# Altium PCB HANC_ANALOG.PcbDoc (part 1 of 2)
Units mil, origin at the board's own origin, x right, y up, seen from the top; angles counter-clockwise.
Board outline 6270 x 3835 mil, 2 copper layers (Top Layer, Bottom Layer); 187 components, 142 nets, 552 pads, 153 vias.
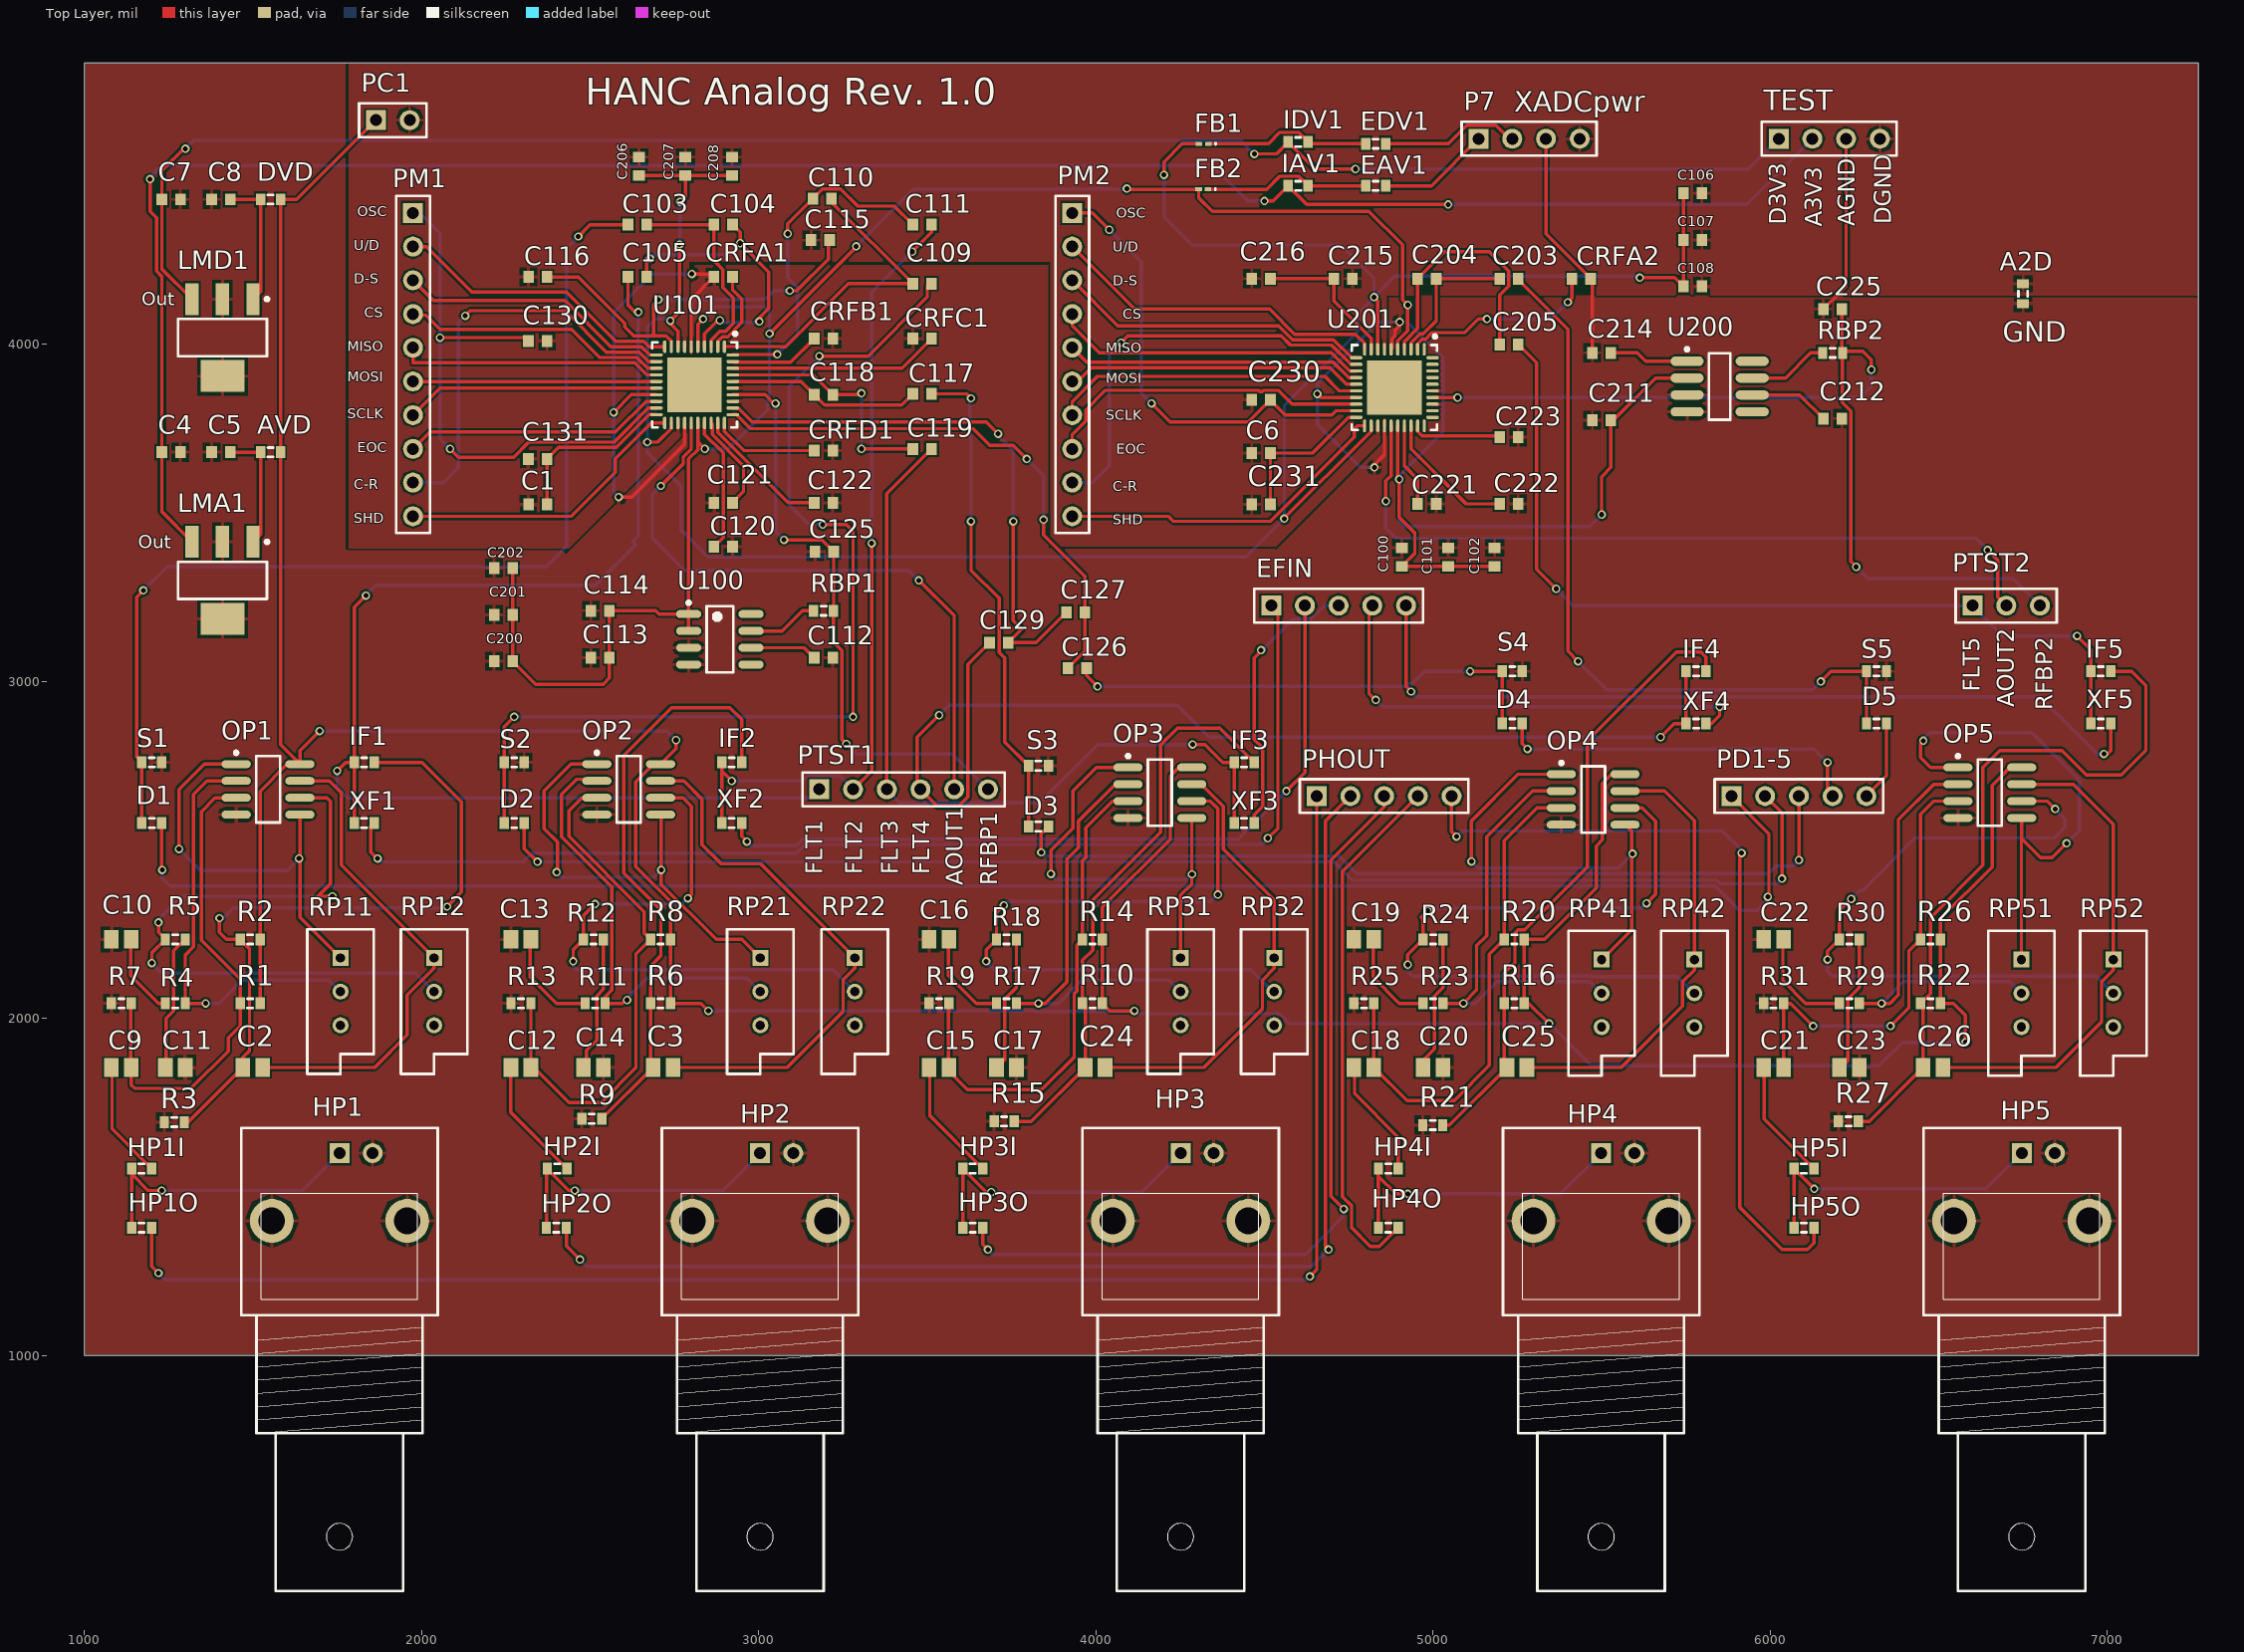
[diagram p0: Top Layer view]
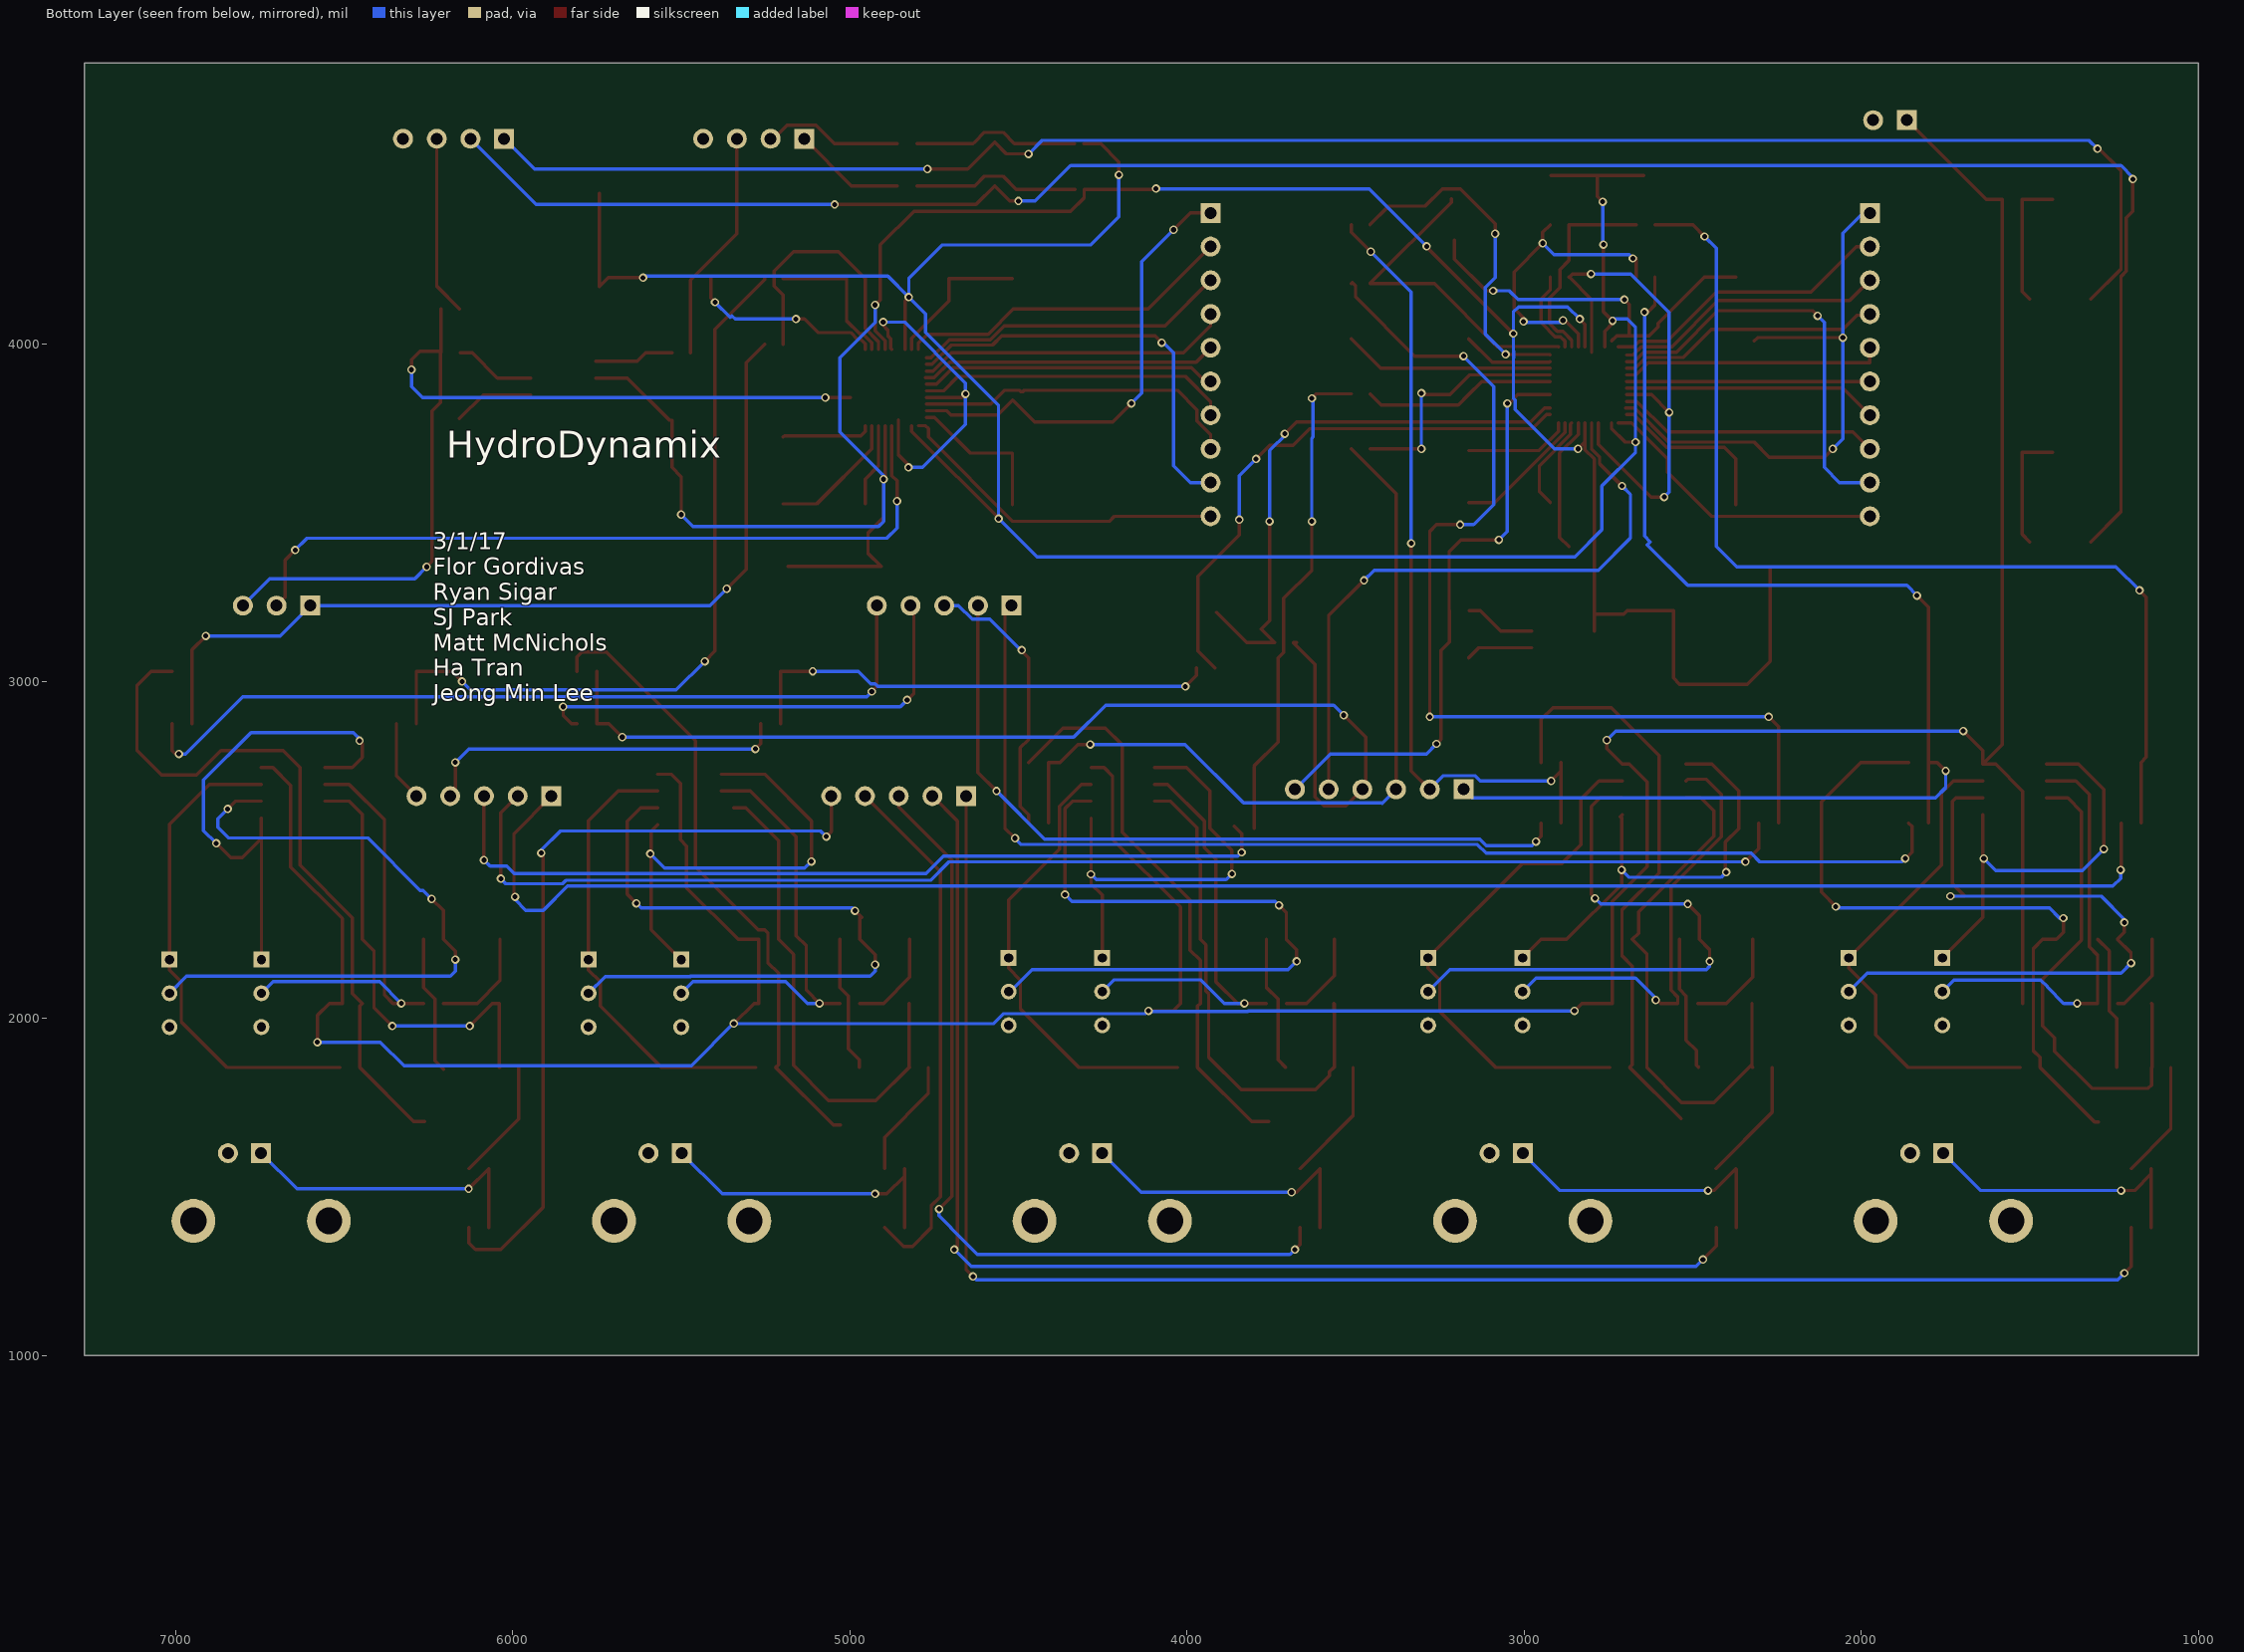
[diagram p1: Bottom Layer view, seen from below]

## Layer stack, top to bottom
Top Solder: solder mask 0.4, Solder Resist, Dk 3.5
Top Layer: signal copper 1.4
Dielectric 1: dielectric 12.6, FR-4, Dk 4.8
Bottom Layer: signal copper 1.4
Bottom Solder: solder mask 0.4, Solder Resist, Dk 3.5

## Board outline
1000,1000 1000,4835 7270,4835 7270,1000

## Design rules (kind name [scope] priority, off if disabled: settings)
Clearance [All] p1: gap=6
MinimumSolderMaskSliver [All] p1 off: minsoldermaskwidth=8
PolygonConnect [All] p1: connectstyle=Relief reliefconductorwidth=10 reliefentries=4 polygonreliefangle="90 Angle" airgapwidth=10
RoutingVias [All] p1: holewidth=15 width=25 viastyle="Through Hole" minholewidth=15 minwidth=25 maxholewidth=15 maxwidth=25
SolderMaskExpansion [All] p1: expansion=4
Width [All] p1: maxlimit=10 minlimit=10 preferedwidth=10
29 further rules are at their usual default settings.

## Classes and differential pairs
component class U_MAXIM-ADC2: 30 C200 C201 C202 C203 C204 C205 C207 C208 C211 C212 C214 C215 C216 C221 C222 C223 C225 C230 C231 CRFA2 PTST2 RBP2 S5 U200 U201
component class U_MAXIM-ADC1: C100 C102 C103 C104 C105 C106 C107 C108 C109 C110 C111 C112 C113 C114 C115 C116 C117 C118 C119 C120 C121 C122 C125 C126 C127 C129 C130 C131 CRFA1 CRFB1 CRFC1 CRFD1 D1 D2 D3 D4 D5 EAV1 EDV1 EFIN FB1 FB2 IAV1 IDV1 PD1-5 PHOUT PTST1 RBP1 S1 S2 S3 S4 U100 U101
component class HANC_Analog_TS: A2D AVD C1 C4 C5 C6 C7 C8 DVD LMA1 LMD1 P7 PC1 PM1 PM2 TEST
component class HAMP2: C21 C22 C23 C26 HP5 HP5I HP5O IF5 OP5 R22 R26 R27 R29 R30 R31 RP51 RP52 XF5
component class HAMP1: C2 C3 C9 C10 C11 C12 C13 C14 C15 C16 C17 C18 C19 C20 C24 C25 HP1 HP1I HP1O HP2 HP2I HP2O HP3 HP3I HP3O HP4 HP4I HP4O IF1 IF2 IF3 IF4 OP1 OP2 OP3 OP4 R1 R2 R3 R4 R5 R6 R7 R8 R9 R10 R11 R12 R13 R14 R15 R16 R17 R18 R19 R20 R21 R23 R24 R25 RP11 RP12 RP21 RP22 RP31 RP32 RP41 RP42 XF1 XF2 XF3 XF4
polygon class DGND: NONET_L01_P000
polygon class AGND: NONET_L01_P002

## Components (designator, comment, footprint, x,y, rotation, side; value= is the part's Value field where it differs from the comment)
A2D "Res3" J1-0603 6750,4150 r270 top
AVD "Res3" J1-0603 1552.62,3680 r180 top
C1 "Cap Semi" 1608[0603] 2345,3525 r0 top
C2 "Cap Semi" C0805 1499.87,1855 r180 top
C3 "Cap Semi" C0805 2716.87,1855 r180 top
C4 "Cap Semi" 1608[0603] 1257.62,3680 r180 top
C5 "Cap Semi" 1608[0603] 1405.12,3680 r0 top
C6 "Cap Semi" 1608[0603] 4490,3677.5 r0 top
C7 "Cap Semi" 1608[0603] 1257.62,4430 r180 top
C8 "Cap Semi" 1608[0603] 1405.12,4430 r0 top
C9 "Cap Semi" C0805 1110,1855 r0 top
C10 "Cap Semi" C0805 1110,2235 r0 top
C11 "Cap Semi" C0805 1270,1855 r180 top
C12 "Cap Semi" C0805 2295,1855 r0 top
C13 "Cap Semi" C0805 2295,2235 r0 top
C14 "Cap Semi" C0805 2510,1855 r180 top
C15 "Cap Semi" C0805 3535,1855 r0 top
C16 "Cap Semi" C0805 3535,2235 r0 top
C17 "Cap Semi" C0805 3735,1855 r180 top
C18 "Cap Semi" C0805 4795,1855 r0 top
C19 "Cap Semi" C0805 4795,2235 r0 top
C20 "Cap Semi" C0805 5000,1855 r180 top
C21 "Cap Semi" C0805 6010,1855 r0 top
C22 "Cap Semi" C0805 6010,2235 r0 top
C23 "Cap Semi" C0805 6235,1855 r180 top
C24 "Cap Semi" C0805 3998,1855 r180 top
C25 "Cap Semi" C0805 5249,1855 r180 top
C26 "Cap Semi" C0805 6483,1855 r180 top
C100 "Cap Semi" 1608[0603] 4907,3369 r90 top
C101 "Cap Semi" 1608[0603] 5045,3369 r90 top
C102 "Cap Semi" 1608[0603] 5183,3369 r90 top
C103 "Cap Semi" 1608[0603] 2640,4355 r0 top
C104 "Cap Semi" 1608[0603] 2895,4355 r180 top
C105 "Cap Semi" 1608[0603] 2640,4200 r0 top
C106 "Cap Semi" 1608[0603] 5770,4448 r0 top
C107 "Cap Semi" 1608[0603] 5770,4310 r0 top
C108 "Cap Semi" 1608[0603] 5770,4172 r0 top
C109 "Cap Semi" 1608[0603] 3485,4180 r180 top
C110 "Cap Semi" 1608[0603] 3188.44,4432.33 r0 top
C111 "Cap Semi" 1608[0603] 3485,4355 r180 top
C112 "Cap Semi" 1608[0603] 3192.44,3070 r0 top
C113 "Cap Semi" 1608[0603] 2530,3070 r180 top
C114 "Cap Semi" 1608[0603] 2530,3210 r180 top
C115 "Cap Semi" 1608[0603] 3183,4309 r180 top
C116 "Cap Semi" 1608[0603] 2345,4200 r180 top
C117 "Cap Semi" 1608[0603] 3485,3853.33 r180 top
C118 "Cap Semi" 1608[0603] 3192.44,3850.83 r180 top
C119 "Cap Semi" 1608[0603] 3485,3690 r180 top
C120 "Cap Semi" 1608[0603] 2895,3400 r180 top
C121 "Cap Semi" 1608[0603] 2895,3530 r180 top
C122 "Cap Semi" 1608[0603] 3192.44,3530 r180 top
C125 "Cap Semi" 1608[0603] 3195,3385 r180 top
C126 "Cap Semi" 1608[0603] 3945,3040 r180 top
C127 "Cap Semi" 1608[0603] 3940,3205 r0 top
C129 "Cap Semi" 1608[0603] 3712.44,3115 r0 top
C130 "Cap Semi" 1608[0603] 2344.88,4010 r0 top
C131 "Cap Semi" 1608[0603] 2344.88,3660 r180 top
C200 "Cap Semi" 1608[0603] 2243,3060 r180 top
C201 "Cap Semi" 1608[0603] 2243,3198 r180 top
C202 "Cap Semi" 1608[0603] 2243,3336 r180 top
C203 "Cap Semi" 1608[0603] 5225,4195 r180 top
C204 "Cap Semi" 1608[0603] 4981.95,4195 r0 top
C205 "Cap Semi" 1608[0603] 5225,4000 r180 top
C206 "Cap Semi" 1608[0603] 2645,4528 r90 top
C207 "Cap Semi" 1608[0603] 2783,4528 r90 top
C208 "Cap Semi" 1608[0603] 2921,4528 r90 top
C211 "Cap Semi" 1608[0603] 5500,3775 r180 top
C212 "Cap Semi" 1608[0603] 6185,3780 r0 top
C214 "Cap Semi" 1608[0603] 5500,3975 r180 top
C215 "Cap Semi" 1608[0603] 4733.33,4195 r0 top
C216 "Cap Semi" 1608[0603] 4490,4195 r180 top
C221 "Cap Semi" 1608[0603] 4981.95,3526.91 r180 top
C222 "Cap Semi" 1608[0603] 5225,3526.91 r0 top
C223 "Cap Semi" 1608[0603] 5225,3725 r180 top
C225 "Cap Semi" 1608[0603] 6185,4105 r180 top
C230 "Cap Semi" 1608[0603] 4490,3835 r180 top
C231 "Cap Semi" 1608[0603] 4490,3525 r180 top
CRFA1 "Cap Semi" 1608[0603] 2895,4200 r0 top
CRFA2 "Cap Semi" 1608[0603] 5440,4195 r180 top
CRFB1 "Cap Semi" 1608[0603] 3192.44,4016.67 r180 top
CRFC1 "Cap Semi" 1608[0603] 3485,4016.67 r0 top
CRFD1 "Cap Semi" 1608[0603] 3192.44,3685 r180 top
D1 "Res3" J1-0603 1200,2580 r180 top
D2 "Res3" J1-0603 2275,2580 r180 top
D3 "Res3" J1-0603 3830,2570 r180 top
D4 "Res3" J1-0603 5235,2875 r180 top
D5 "Res3" J1-0603 6315,2875 r180 top
DVD "Res3" J1-0603 1552.62,4430 r180 top
EAV1 "Res3" J1-0603 4830,4470 r0 top
EDV1 "Res3" J1-0603 4830,4595 r0 top
EFIN "Header 5" HDR1X5 4520,3225 r0 top
FB1 "FerriteBead" 0603 4320,4595 r180 top
FB2 "FerriteBead" 0603 4318.78,4460 r180 top
HP1 "BNC" "BNC_RA CON" 1756.91,1600.79 r90 top
HP1I "Res3" J1-0603 1170,1555 r180 top
HP1O "Res3" J1-0603 1170,1380 r0 top
HP2 "BNC" "BNC_RA CON" 3004.13,1600.79 r90 top
HP2I "Res3" J1-0603 2402.5,1555 r180 top
HP2O "Res3" J1-0603 2400,1380 r0 top
HP3 "BNC" "BNC_RA CON" 4251.35,1600.79 r90 top
HP3I "Res3" J1-0603 3635,1555 r180 top
HP3O "Res3" J1-0603 3635,1380 r0 top
HP4 "BNC" "BNC_RA CON" 5498.57,1600.79 r90 top
HP4I "Res3" J1-0603 4867.5,1555 r180 top
HP4O "Res3" J1-0603 4867.5,1380 r0 top
HP5 "BNC" "BNC_RA CON" 6745.79,1600.79 r90 top
HP5I "Res3" J1-0603 6100,1555 r180 top
HP5O "Res3" J1-0603 6100,1380 r0 top
IAV1 "Res3" J1-0603 4600,4470 r180 top
IDV1 "Res3" J1-0603 4600,4600 r180 top
IF1 "Res3" J1-0603 1830,2760 r0 top
IF2 "Res3" J1-0603 2920,2760 r0 top
IF3 "Res3" J1-0603 4440,2760 r0 top
IF4 "Res3" J1-0603 5780,3030 r0 top
IF5 "Res3" J1-0603 6980.47,3030 r0 top
LMA1 "LM3940" SOT223_N 1410,3300 r270 top
LMD1 "LM3940" SOT223_N 1410,4020 r270 top
OP1 "OP262TRZ-EP" ADI-R-8_N 1545,2680 r0 top
OP2 "OP262TRZ-EP" ADI-R-8_N 2614.64,2680 r0 top
OP3 "OP262TRZ-EP" ADI-R-8_N 4190,2670 r0 top
OP4 "OP262TRZ-EP" ADI-R-8_N 5475,2650 r0 top
OP5 "OP262TRZ-EP" ADI-R-8_N 6651.3,2670 r0 top
P7 "Header 4" HDR1X4 5135,4610 r0 top
PC1 "Header 2" HDR1X2 1865,4665 r0 top
PD1-5 "Header 5" HDR1X5 5885,2660 r0 top
PHOUT "Header 5" HDR1X5 4655,2660 r0 top
PM1 "Header 10" HDR1X10 1975,4390 r270 top
PM2 "Header 10" HDR1X10 3930,4390 r270 top
PTST1 "Header 6" HDR1X6 3180,2680 r0 top
PTST2 "Header 3" HDR1X3 6600,3225 r0 top
R1 "Res3" J1-0603 1492,2045 r0 top
R2 "Res3" J1-0603 1492,2235 r0 top
R3 "Res3" J1-0603 1267,1693 r0 top
R4 "Res3" J1-0603 1270,2045 r0 top
R5 "Res3" J1-0603 1270,2235 r180 top
R6 "Res3" J1-0603 2709,2045 r0 top
R7 "Res3" J1-0603 1110,2045 r0 top
R8 "Res3" J1-0603 2709,2235 r0 top
R9 "Res3" J1-0603 2505,1703 r0 top
R10 "Res3" J1-0603 3990.13,2045 r0 top
R11 "Res3" J1-0603 2515,2045 r0 top
R12 "Res3" J1-0603 2510,2235 r180 top
R13 "Res3" J1-0603 2295,2045 r0 top
R14 "Res3" J1-0603 3990.13,2235 r0 top
R15 "Res3" J1-0603 3728,1695 r0 top
R16 "Res3" J1-0603 5241.13,2045 r0 top
R17 "Res3" J1-0603 3735,2045 r0 top
R18 "Res3" J1-0603 3735,2235 r180 top
R19 "Res3" J1-0603 3535,2045 r0 top
R20 "Res3" J1-0603 5241.13,2235 r0 top
R21 "Res3" J1-0603 4999,1684 r0 top
R22 "Res3" J1-0603 6475.13,2045 r0 top
R23 "Res3" J1-0603 5000,2045 r0 top
R24 "Res3" J1-0603 5000,2235 r180 top
R25 "Res3" J1-0603 4795,2045 r0 top
R26 "Res3" J1-0603 6475.13,2235 r0 top
R27 "Res3" J1-0603 6232,1695 r0 top
R29 "Res3" J1-0603 6235,2045 r0 top
R30 "Res3" J1-0603 6235,2235 r180 top
R31 "Res3" J1-0603 6010,2045 r0 top
RBP1 "Res3" J1-0603 3192.44,3210 r180 top
RBP2 "Res3" J1-0603 6185,3975 r180 top
RP11 "10k" Trim_Bourns3296 1760,2080 r270 top
RP12 "10k" Trim_Bourns3296 2037.5,2080 r270 top
RP21 "10k" Trim_Bourns3296 3005,2080 r270 top
RP22 "10k" Trim_Bourns3296 3285,2080 r270 top
RP31 "10k" Trim_Bourns3296 4251.35,2080 r270 top
RP32 "10k" Trim_Bourns3296 4528.85,2080 r270 top
RP41 "10k" Trim_Bourns3296 5500,2075 r270 top
RP42 "10k" Trim_Bourns3296 5775,2075 r270 top
RP51 "10k" Trim_Bourns3296 6745,2075 r270 top
RP52 "10k" Trim_Bourns3296 7017.5,2075 r270 top
S1 "Res3" J1-0603 1200,2760 r180 top
S2 "Res3" J1-0603 2275,2760 r180 top
S3 "Res3" J1-0603 3830,2750 r180 top
S4 "Res3" J1-0603 5235,3030 r180 top
S5 "Res3" J1-0603 6315,3030 r180 top
TEST "Header 4" HDR1X4 6025,4610 r0 top
U100 "MAX6126AASA41+" MAXM-S8+4_L 2885,3125 r0 top
U101 "MAX11043" QFN50P600X600X80_HS-41N 2810,3880 r270 top
U200 "MAX6126AASA41+" MAXM-S8+4_M 5850,3875 r0 top
U201 "MAX11043" QFN50P600X600X80_HS-41N 4885.5,3871.81 r270 top
XF1 "Res3" J1-0603 1830,2580 r180 top
XF2 "Res3" J1-0603 2920,2580 r180 top
XF3 "Res3" J1-0603 4440,2580 r180 top
XF4 "Res3" J1-0603 5780,2875 r180 top
XF5 "Res3" J1-0603 6980.47,2875 r180 top

## Footprints (in the part's own frame and the unit in brackets; to place one, negate y for a bottom-side part, rotate by r counter-clockwise, add the part's x,y. Pads: shape width x height; smd on the part's side, far side on the other; paste and mask are expansions set on the pad)
0603 [mm] "Chip Inductor, Body 0.6x0.3mm, IPC High Density"
  rect 0.5x0.3 smd: 1(-0.35,0) 2(0.35,0)
  silkscreen extent -0.9,-0.05 -0.9,0.05, body extent -0.33,-0.18 0.33,0.18, height 0.55
1608[0603] [mm] "Chip Capacitor, Body 1.6x0.8mm, IPC High Density"
  rect 0.8x0.9 smd: 1(-0.7,0) 2(0.7,0)
  body extent -0.87,-0.48 0.87,0.48, height 1.3
ADI-R-8_N [mm] "SOIC, 8-Leads, Body 4.9x3.9mm, Pitch 1.27mm, IPC Medium Density"
  oval 2.2x0.6 smd: 1(-2.4,1.905) 2(-2.4,0.635) 3(-2.4,-0.635) 4(-2.4,-1.905) 5(2.4,-1.905) 6(2.4,-0.635) 7(2.4,0.635) 8(2.4,1.905)
  silkscreen extent -2.52,-2.5 0.9,2.88, body extent -2,-2.5 2,2.5, height 1.75
"BNC_RA CON" [mm] "Connector; BNC Elbow"
  rect 1.5x1.5 hole 0.9: 1(0,0)
  round 3.3 hole 2: 2(-5.1,-5.1) 2(-5.1,5.1)
  round 1.5 hole 0.9: 2(0,-2.5)
  silkscreen extent -33,-7.4 1.9,7.4
C0805 [mm] "Chip Capacitor, Body 2.0x1.3mm, IPC High Density"
  rect 1.1x1.4 smd: 1(-0.75,0) 2(0.75,0)
  body extent -1.1,-0.72 1.1,0.72, height 1.4
HDR1X2 [mm] "Connector; Header; 2 Position"
  rect 1.5x1.5 hole 0.9: 1(0,0)
  round 1.5 hole 0.9: 2(2.54,0)
  silkscreen extent -1.27,-1.27 3.81,1.27
HDR1X3 [mm] "Connector; Header; 3 Position"
  rect 1.5x1.5 hole 0.9: 1(0,0)
  round 1.5 hole 0.9: 2(2.54,0) 3(5.08,0)
  silkscreen extent -1.27,-1.27 6.35,1.27
HDR1X4 [mm] "Connector; Header; 4 Position"
  rect 1.5x1.5 hole 0.9: 1(0,0)
  round 1.5 hole 0.9: 2(2.54,0) 3(5.08,0) 4(7.62,0)
  silkscreen extent -1.27,-1.27 8.89,1.27
HDR1X5 [mm] "Connector; Header; 5 Position"
  rect 1.5x1.5 hole 0.9: 1(0,0)
  round 1.5 hole 0.9: 2(2.54,0) 3(5.08,0) 4(7.62,0) 5(10.16,0)
  silkscreen extent -1.27,-1.27 11.43,1.27
HDR1X6 [mm] "Connector; Header; 6 Position"
  rect 1.5x1.5 hole 0.9: 1(0,0)
  round 1.5 hole 0.9: 2(2.54,0) 3(5.08,0) 4(7.62,0) 5(10.16,0) 6(12.7,0)
  silkscreen extent -1.27,-1.27 13.97,1.27
HDR1X10 [mm] "Connector; Header; 10 Position"
  rect 1.5x1.5 hole 0.9: 1(0,0)
  round 1.5 hole 0.9: 2(2.54,0) 3(5.08,0) 4(7.62,0) 5(10.16,0) 6(12.7,0) 7(15.24,0) 8(17.78,0) 9(20.32,0) 10(22.86,0)
  silkscreen extent -1.27,-1.27 24.13,1.27
J1-0603 [mm] "Chip Resistor, Body 1.6x0.8mm, IPC High Density"
  rect 0.7x0.9 smd: 1(-0.75,0) 2(0.75,0)
  silkscreen extent -0.2,-0.35 0.2,0.35, body extent -0.85,-0.48 0.85,0.48, height 0.9
MAXM-S8+4_L [mm] "SOIC, 8-Leads, Body 4.9x3.9mm, Pitch 1.27mm, IPC High Density"
  oval 1.9x0.6 smd: 1(-2.35,1.905) 2(-2.35,0.635) 3(-2.35,-0.635) 4(-2.35,-1.905) 5(2.35,-1.905) 6(2.35,-0.635) 7(2.35,0.635) 8(2.35,1.905)
  silkscreen extent -2.47,-2.5 1,2.88, body extent -2,-2.5 2,2.5, height 1.75
MAXM-S8+4_M [mm] "SOIC, 8-Leads, Body 4.9x3.9mm, Pitch 1.27mm, IPC Low Density"
  oval 2.5x0.7 smd: 1(-2.45,1.905) 2(-2.45,0.635) 3(-2.45,-0.635) 4(-2.45,-1.905) 5(2.45,-1.905) 6(2.45,-0.635) 7(2.45,0.635) 8(2.45,1.905)
  silkscreen extent -2.57,-2.5 0.8,2.93, body extent -2,-2.5 2,2.5, height 1.75
QFN50P600X600X80_HS-41N [mm] "QFN, 40-Leads, Body 6.00x6.00mm, Pitch 0.50mm, Thermal Pad 4.10x4.10mm, IPC Medium Density"
  oval 0.95x0.25 smd: 1(-2.875,2.25) 2(-2.875,1.75) 3(-2.875,1.25) 4(-2.875,0.75) 5(-2.875,0.25) 6(-2.875,-0.25) 7(-2.875,-0.75) 8(-2.875,-1.25) 9(-2.875,-1.75) 10(-2.875,-2.25) 21(2.875,-2.25) 22(2.875,-1.75) 23(2.875,-1.25) 24(2.875,-0.75) 25(2.875,-0.25) 26(2.875,0.25) 27(2.875,0.75) 28(2.875,1.25) 29(2.875,1.75) 30(2.875,2.25)
  oval 0.25x0.95 smd: 11(-2.25,-2.875) 12(-1.75,-2.875) 13(-1.25,-2.875) 14(-0.75,-2.875) 15(-0.25,-2.875) 16(0.25,-2.875) 17(0.75,-2.875) 18(1.25,-2.875) 19(1.75,-2.875) 20(2.25,-2.875) 31(2.25,2.875) 32(1.75,2.875) 33(1.25,2.875) 34(0.75,2.875) 35(0.25,2.875) 36(-0.25,2.875) 37(-0.75,2.875) 38(-1.25,2.875) 39(-1.75,2.875) 40(-2.25,2.875)
  rect 4.1x4.1 smd: 41(0,0)
  silkscreen extent -3.97,-3.2 3.2,3.2, body extent -3.05,-3.05 3.05,3.05, height 0.8
SOT223_N [mm] "SOT223, 4-Leads, Body 6.5x3.5mm, Pitch 2.3mm, Lead Span 7mm, IPC Medium Density"
  rect 2.4x1 smd: 1(-2.9,2.3) 2(-2.9,0) 3(-2.9,-2.3)
  rect 2.4x3.3 smd: 4(2.9,0)
  silkscreen extent -3.02,-3.35 1.4,3.48, body extent -1.85,-3.35 1.85,3.35, height 1.7
Trim_Bourns3296 [mm] "Trimmer Bourns3296 or AB-85W"
  rect 1.2x1.2 hole 0.7: 1(-2.54,0)
  round 1.2 hole 0.7: 2(0,0) 3(2.54,0)
  silkscreen extent -4.7,-2.5 6.2,2.5, body extent -4.6,-2.4 4.6,2.4, height 12.16

## Part data
A2D AVD D1 D2 D3 D4 D5 DVD EAV1 EDV1 HP1I HP1O HP2I HP2O HP3I HP3O HP4I HP4O HP5I HP5O IAV1 IDV1 IF1 IF2 IF3 IF4 IF5 R1 R2 R3 R4 R5 R6 R7 R8 R9 R10 R11 R12 R13 R14 R15 R16 R17 R18 R19 R20 R21 R22 R23 R24 R25 R26 R27 R29 R30 R31 RBP1 RBP2 S1 S2 S3 S4 S5 XF1 XF2 XF3 XF4 XF5: "Resistor"
C1 C2 C3 C4 C5 C6 C7 C8 C9 C10 C11 C12 C13 C14 C15 C16 C17 C18 C19 C20 C21 C22 C23 C24 C25 C26 C100 C101 C102 C103 C104 C105 C106 C107 C108 C109 C110 C111 C112 C113 C114 C115 C116 C117 C118 C119 C120 C121 C122 C125 C126 C127 C129 C130 C131 C200 C201 C202 C203 C204 C205 C206 C207 C208 C211 C212 C214 C215 C216 C221 C222 C223 C225 C230 C231 CRFA1 CRFA2 CRFB1 CRFC1 CRFD1: "Capacitor (Semiconductor SIM Model)"
EFIN PD1-5 PHOUT: "Header, 5-Pin"
FB1 FB2: library part Inductor, "Inductor"
HP1 HP2 HP3 HP4 HP5: "BNC Elbow Connector"
LMA1 LMD1: library part Component_1
OP1 OP2 OP3 OP4 OP5: "Double Channel Wide Bandwidth Operational Amplifier, 15 MHz BW, 13 V/us SR, Military, 8-pin SOIC (R-8), Tube"
P7: "External power for ADC1"
PC1: "Power for analog board"
PM1: "GPIO for ADC1"
PM2: "GPIO for ADC2"
PTST1: "ADC1 signal test"
PTST2: "ADC2 Signal Test Header"
RP11 RP12 RP21 RP22 RP31 RP32 RP41 RP42 RP51 RP52: library part RES_Trim, "Resistor Trimmer"
TEST: "Header, 4-Pin"
U100 U200: library part CMP-0977-00016-1, "Ultra-High-Precision, Ultra-Low-Noise, Series Voltage Reference, 4.096 V, -40 to 125 degC, 8-Pin SOIC (S8+4), RoHS, Tube"

## Via types
v1: diameter 25, hole 15, Top Layer to Bottom Layer, 153 vias

## Nets (pads, with @x,y where several pads share a name; then routed paths per layer and width w, separated by ;. In a path a pad name is that pad's centre, name@x,y a point inside that pad or via, vN(x,y) a via of type N, cw(c..) or ccw(c..) an arc to the next point about the centre after c; other vN are vias at no path point)
5V: AVD.1 DVD.1 OP1.8 OP2.8 OP3.8 OP4.8 OP5.8 PC1.1 R1.2 R2.2 R6.2 R8.2 R10.2 R14.2 R16.2 R20.2 R22.2 R26.2 | length 11776.2
  Top Layer w10: R1.2@1521.53,2045 R2.2@1521.53,2235 1521.53,2674.53 1602,2755 OP1.8@1639.49,2755 ; v1(1698,2853) 1639.49,2794.49 OP1.8@1639.49,2755 ; PC1.1@1865,4665 1630,4430 DVD.1@1582.15,4430 AVD.1@1582.15,3680 1582.15,2812.34 OP1.8@1639.49,2755 ; v1(2755,2826) 2755,2800.87 OP2.8@2709.13,2755 2688,2755 2635,2702 2635,2451.37 2738.53,2347.84 R8.2@2738.53,2235 R6.2@2738.53,2045 2829,2045 v1(2851,2023) ; v1(4114,2023) 4041.65,2023 R10.2@4019.65,2045 R14.2@4019.65,2235 4019.65,2330.65 4221,2532 4221,2720 4246,2745 OP3.8@4284.49,2745 ; v1(5344,1985) 5284,2045 R16.2@5270.65,2045 R20.2@5270.65,2235 5331,2235 5484,2388 5484,2512.14 5502,2530.14 5502,2697 5530,2725 OP4.8@5569.49,2725 ; v1(6579,1930) 6579,2010 6544,2045 R22.2@6504.65,2045 R26.2@6504.65,2235 6504.65,2296.65 6658,2450 6658,2692 6711,2745 OP5.8@6745.79,2745
  Bottom Layer w10: v1(1698,2853) 2728,2853 v1(2755,2826) ; v1(2851,2023) 3818.77,2023 3820.27,2021.5 4112.5,2021.5 v1(4114,2023) 4122.38,2014.62 4543.19,2014.62 4572.81,1985 v1@5339,1985 ; v1(5344,1985) v1@5339,1985 ; v1(6579,1930) 6392,1930 6322,1860 5470,1860 5342,1988 v1@5339,1985
A3V3: C4.2 IAV1.2 LMA1.3 TEST.2 | length 6242.6
  Top Layer w10: v1(1195,4490) 1195,4395 1214.06,4375.94 1214.06,4216.93 1230.06,4200.93 C4.2@1230.06,3680 1230.06,3503.56 LMA1.3@1319.45,3414.17 ; v1(4500,4425) 4525.47,4425 IAV1.2@4570.47,4470 4625.47,4415 v1(5045,4415)
  Bottom Layer w10: v1(1195,4490) 1195,4495 1230,4530 4345,4530 4450,4425 v1(4500,4425) ; v1(5045,4415) 5930,4415 TEST.2@6125,4610
AGND: A2D.2 C4.1 C5.1 C7.1 C8.1 C10.1 C11.1 C13.1 C14.1 C16.1 C17.1 C19.1 C20.1 C22.1 C23.1 C100.2 C101.2 C102.2 C112.2 C113.2 C114.2 C120.1 C121.2 C122.1 C125.2 C200.2 C201.2 C202.2 C211.2 C212.2 C214.2 C221.1 C222.2 C223.1 C225.2 CRFA1.1 CRFA2.1 CRFB1.1 CRFC1.1 CRFD1.1 HP1.2 HP2.2 HP3.2 HP4.2 HP5.2 LMA1.2 LMA1.4 LMD1.2 LMD1.4 OP1.4 OP2.4 OP3.4 OP4.4 OP5.4 P7.3 R3.1 R7.1 R9.1 R13.1 R15.1 R19.1 R21.1 R25.1 R27.1 R31.1 S1.1 S2.1 S3.1 S4.1 S5.1 TEST.3 U100.3 U100.4 U101.6 U101.17 U101.24 U101.33 U101.35 U200.3 U200.4 U201.6 U201.17 U201.24 U201.33 U201.35 | length 3877.9
  Top Layer w10: v1(2570,3798) 2622.47,3850.47 U101.17@2696.81,3850.47 ; v1(2585,3547) 2624,3547 2780.47,3703.47 U101.24@2780.47,3766.81 ; U101.6@2800.16,3976.58 2800.16,4132.72 CRFA1.1@2866.44,4199 ; v1(2802,4209) 2856.44,4209 CRFA1.1@2866.44,4199 ; CRFA1.1@2867.44,4200 CRFA1.1@2866.44,4199 ; v1(4657,3853) 4667.72,3842.28 U201.17@4772.31,3842.28 ; v1(4826,3635) 4826,3642 4855.97,3671.97 U201.24@4855.97,3775.23 ; U201.6@4875.65,3985 4879.34,3988.68 4879.34,4017.07 4887,4024.73 4887,4042 4901,4056 v1(4901,4066) ; P7.3@5335,4610 5335,4327.56 CRFA2.1@5467.56,4195 5472.44,4190.12 C214.2@5472.44,3975 ; C225.2@6157.44,4105 6225,4172.56 TEST.3@6225,4610
  Bottom Layer w10: v1(2585,3547) 2570,3562 v1(2570,3798) 2570,4095 2684,4209 v1(2802,4209) ; v1(4826,3635) 4784,3635 4657,3762 v1(4657,3853) 4657,3885 4838,4066 v1(4901,4066)
AINAP1: C105.1 IF1.1 PTST1.1 XF1.2 | length 3939.4
  Top Layer w10: v1(1750,2735) 1775,2760 IF1.1@1800.47,2760 ; XF1.2@1800.47,2580 IF1.1@1800.47,2760 ; v1(1835,3255) 1800.47,3220.47 IF1.1@1800.47,2760 ; C105.1@2612.44,4200 2612.44,4116.44 2632.88,4096 v1(2643,4096)
  Bottom Layer w10: v1(1750,2735) 1750,2685 1780,2655 3155,2655 PTST1.1@3180,2680 ; v1(1835,3255) 1865,3285 2515,3285 2635,3405 2626,3414 2643,3431 v1(2643,4096)
AINAP2: C205.1 IF5.1 PTST2.1 XF5.2 | length 2651.5
  Top Layer w10: C205.1@5252.56,4000 5307.56,3945 5307.56,3332.44 v1(5365,3275) ; v1(6910,3135) 6950.94,3094.06 IF5.1@6950.94,3030 XF5.2@6950.94,2875
  Bottom Layer w10: v1(5365,3275) 5415,3225 PTST2.1@6600,3225 6690,3135 v1(6910,3135)
AINBP1: C111.1 IF2.1 PTST1.2 XF2.2 | length 2376.3
  Top Layer w10: XF2.2@2890.47,2580 2890.47,2734.53 ; IF2.1@2890.47,2760 2890.47,2734.53 ; v1(2920,2705) 2890.47,2734.53 ; PTST1.2@3280,2680 3335,2735 v1(3335,3410) ; v1(3455,4275) 3512.56,4332.56 C111.1@3512.56,4355
  Bottom Layer w10: v1(2920,2705) 3130.39,2705 3145.92,2720.53 3239.47,2720.53 PTST1.2@3280,2680 ; v1(3335,3410) 3335,4155 v1(3455,4275)
AINCP1: C119.1 IF3.1 PTST1.3 XF3.2 | length 2386.4
  Top Layer w10: PTST1.3@3380,2680 3380,3557.44 C119.1@3512.56,3690 ; v1(4287,2813) 4323,2813 4376,2760 IF3.1@4410.47,2760 XF3.2@4410.47,2580
  Bottom Layer w10: PTST1.3@3380,2680 3421,2639 3421.47,2639.47 3832.47,2639.47 4006,2813 v1(4287,2813)
AINDP1: C129.1 IF4.1 PTST1.4 XF4.2 | length 3355.3
  Top Layer w10: v1(3535,2900) 3470,2835 3470,2690 PTST1.4@3480,2680 3528.58,2631.42 3594.26,2631.42 3620.53,2657.69 3620.53,3050.65 C129.1@3684.88,3115 C129.1@3675,3115 ; v1(5675,2835) 5715,2875 XF4.2@5750.47,2875 IF4.1@5750.47,3030
  Bottom Layer w10: v1(3535,2900) 3565,2930 4241,2930 4336,2835 v1(5675,2835)
AOUT1: PTST1.5 U101.25 | length 1894.8
  Top Layer w10: v1(2710,3580) 2776.48,3646.48 2776.48,3666.48 2800.16,3690.16 U101.25@2800.16,3766.81 ; v1(3475,3300) 3580,3195 PTST1.5@3580,2680
  Bottom Layer w10: v1(2710,3580) 2685,3555 2685,3425 2780,3330 3445,3330 v1(3475,3300)
AOUT2: PTST2.2 U201.25 | length 2309.8
  Top Layer w10: v1(4860,3535) 4860,3595 4875.65,3610.65 U201.25@4875.65,3758.62 ; v1(6645,3390) 6675,3360 6675,3250 PTST2.2@6700,3225
  Bottom Layer w10: v1(4860,3535) 4860,3455 4890,3425 6610,3425 v1(6645,3390)
AVDD: C100.1 C101.1 C102.1 C113.1 C114.1 C200.1 C201.1 C202.1 C211.1 FB2.2 U100.1 U100.2 U101.5 U101.26 U200.2 U201.5 U201.26 | length 7658.1
  Top Layer w10: C202.1@2270.56,3336 C201.1@2270.56,3198 C200.1@2270.56,3060 2338.56,2992 2539,2992 2557.56,3010.56 C113.1@2557.56,3070 C114.1@2557.56,3210 2695,3210 2705,3200 U100.1@2792.48,3200 ; U100.2@2792.48,3150 U100.1@2792.48,3200 ; U101.26@2819.84,3766.81 2819.84,3710.16 ; U101.5@2819.84,3993.19 2819.84,4059.84 v1(2835,4075) ; v1(2840,3690) 2819.84,3710.16 ; v1(3032,4032) 3289,4289 v1(3289,4291) ; v1(4092,4462) 4094,4460 FB2.2@4305,4460 4305,4435 4345,4395 4810,4395 4910,4295 4910,4132 v1(4925,4117) 4925,4040.1 4895.34,4010.44 U201.5@4895.34,3985 ; U201.26@4895.34,3758.62 4895.34,3604.66 v1(4900,3600) 4900,3487 4946,3441 4946,3380.44 C100.1@4907,3341.44 C101.1@5045,3341.44 C102.1@5183,3341.44 ; v1(5500,3495) 5500,3607.44 5527.56,3635 C211.1@5527.56,3775 5535,3775 5660,3900 U200.2@5753.54,3900 ; U100.1@2792.48,3200 2792.48,3659.85 2819.84,3687.21 2819.84,3710.16
  Bottom Layer w10: v1(2835,4075) 2871,4111 3016.73,4111 3032,4095.73 v1(3032,4032) 3032,3980.23 3031.5,3979.73 3031.5,3960.27 3032,3959.77 3032,3840.23 3026.5,3834.73 3026.5,3806.5 2910,3690 v1(2840,3690) ; v1(3289,4291) 3459,4461 4091,4461 v1(4092,4462) ; v1@4924.5,4117 4924.5,4065.5 5030,3960 5030,3740 4900,3610 v1(4900,3600) 4900,3475 4915,3460 5465,3460 v1(5500,3495) ; v1@4925,4115.23 v1(4925,4117)
D3V3: C7.2 IDV1.2 LMD1.3 TEST.1 | length 5358.7
  Top Layer w10: v1(1300,4580) 1300,4585 1230.06,4515.06 C7.2@1230.06,4430 1230.06,4223.56 LMD1.3@1319.45,4134.17 ; v1(4470,4565) 4535.47,4565 IDV1.2@4570.47,4600 4650.47,4520 v1(4770,4520)
  Bottom Layer w10: v1(1300,4580) 1325,4605 4430,4605 v1(4470,4565) ; v1(4770,4520) 5935,4520 TEST.1@6025,4610
DGND: A2D.1 C1.1 C6.1 C106.2 C107.2 C108.2 C115.2 C116.2 C130.2 C131.2 C206.2 C207.2 C208.2 C215.2 C216.2 C230.2 C231.2 P7.4 PC1.2 TEST.4 U101.7 U101.23 U201.7 U201.23
DVDD: C106.1 C107.1 C108.1 C206.1 C207.1 C208.1 FB1.2 U101.8 U101.22 U201.8 U201.22 | length 7105.4
  Top Layer w10: C206.1@2645,4500.44 C207.1@2783,4500.44 ; v1(2670,3710) 2700.9,3710 2741.1,3750.2 U101.22@2741.1,3766.81 ; U101.8@2760.79,3993.19 2760.79,4039.21 2738,4062 v1(2738,4070) 2765,4097 v1(2765,4296) ; v1(2767,4423) 2783,4439 C207.1@2783,4500.44 ; C208.1@2921,4500.44 C207.1@2783,4500.44 ; v1(4202,4503) 4202,4541 4256,4595 FB1.2@4306.22,4595 ; v1(4559,3483) 4559,3485 4802.92,3728.92 4803.51,3728.92 4816.6,3742.01 U201.22@4816.6,3758.62 ; v1(4825,4140) 4836.28,4128.72 U201.8@4836.28,3985 ; v1(5613,4198) 5716.44,4198 C108.1@5742.44,4172 C107.1@5742.44,4310 ; C107.1@5742.44,4295.56 C107.1@5742.44,4310 ; C106.1@5742.44,4448 C107.1@5742.44,4310
  Bottom Layer w10: v1(2738,4070) 2733,4075 2695,4075 2670,4050 v1(2670,3710) 2670,3680 2770,3580 2770,3450 2850,3370 4445,3370 4558,3483 v1(4559,3483) 4559,3819 4775,4035 4775,4090 v1(4825,4140) ; v1(2765,4296) 2767,4298 v1(2767,4423) ; v1(4202,4503) 4202,4378 4285,4295 4725,4295 4825,4195 v1(4825,4140) ; v1(5613,4198) 5609,4202 4887,4202 v1(4825,4140)
DVREG: C215.1 C216.1 U201.9 | length 444.1
  Top Layer w10: C216.1@4517.56,4195 C215.1@4705.77,4195 4705.77,4129.23 4816.6,4018.4 U201.9@4816.6,3985
DVREG: C115.1 C116.1 U101.9 | length 1177.1
  Top Layer w10: C116.1@2372.56,4200 2465,4200 2602.5,4062.5 2602.5,4052.27 2629.77,4025 2689.69,4025 ; v1(2703,4133) 2688,4118 2688,4026.69 2689.69,4025 ; 2725.9,4025 2689.69,4025 ; 2726.5,4024.4 U101.9@2741.1,4009.8 ; v1(3092,4159) 3113,4159 3207,4253 C115.1@3207,4309
  Bottom Layer w10: v1(2703,4133) 3018,4133 3044,4159 v1(3092,4159)
EXT_AMP1_H1_IN: HP1O.2 PHOUT.1 | length 5004.2
  Top Layer w10: HP1O.2@1199.53,1380 1199.53,1265.47 v1(1220,1245) ; v1(4635,1235) 4655,1255 PHOUT.1@4655,2660
  Bottom Layer w10: v1(1220,1245) 1240,1225 4625,1225 v1(4635,1235)
EXT_AMP1_H1_OUT: EFIN.1 XF1.1 | length 3501.6
  Top Layer w10: XF1.1@1859.53,2580 1850,2570.47 1850,2494.06 1869.06,2475 v1(1870,2475) ; v1(4510,2535) 4540,2565 4540,3205 EFIN.1@4520,3225
  Bottom Layer w10: v1(1870,2475) 1880,2465 2301.23,2465 2327.23,2491 3113,2491 3138.5,2516.5 4491.5,2516.5 v1(4510,2535)
EXT_AMP2_H2_IN: HP2O.2 PHOUT.2 | length 3740.1
  Top Layer w10: HP2O.2@2429.53,1380 2429.53,1325.47 v1(2470,1285) ; v1(4690,1315) 4681,1324 4681,2586 PHOUT.2@4755,2660
  Bottom Layer w10: v1(2470,1285) 2490,1265 4640,1265 v1(4690,1315)
EXT_AMP2_H2_OUT: EFIN.2 XF2.1 | length 2306.3
  Top Layer w10: XF2.1@2949.53,2580 2949.53,2540.47 v1(2965,2525) ; v1(4565,2675) 4620,2730 EFIN.2@4620,3225
  Bottom Layer w10: v1(2965,2525) 2977,2513 3112.37,2513 3131.87,2532.5 4422.5,2532.5 v1(4565,2675)
EXT_AMP3_H3_IN: HP3O.2 PHOUT.3 | length 2507.5
  Top Layer w10: HP3O.2@3664.53,1380 3664.53,1330.47 v1(3680,1315) ; v1(4735,1435) 4697,1473 4697,2470.62 4855,2628.62 PHOUT.3@4855,2660
  Bottom Layer w10: v1(3680,1315) 3695,1300 4621.77,1300 4700.27,1378.5 4700.27,1380.27 4735,1415 v1(4735,1435)
EXT_AMP3_H3_OUT: EFIN.3 XF3.1 | length 830.9
  Top Layer w10: XF3.1@4469.53,2580 4469.53,2604.43 4494.31,2629.2 4494.31,2803.32 4469.53,2828.1 4469.53,3069.53 4493,3093 v1(4490,3093)
  Bottom Layer w10: v1(4490,3093) 4493,3093 4584.47,3184.47 4636.79,3184.47 4677.31,3225 EFIN.3@4720,3225
EXT_AMP4_H4_IN: HP4O.2 PHOUT.4 | length 1569.4
  Top Layer w10: HP4O.2@4897.03,1380 4841.03,1324 4814,1324 4758.5,1379.5 4758.5,1444.73 4731,1472.23 4731,2436 PHOUT.4@4955,2660
EXT_AMP4_H4_OUT: EFIN.4 XF4.1 | length 1396.5
  Top Layer w10: EFIN.4@4820,3225 4810,3215 4810,2965 v1(4830,2945) ; XF4.1@5809.53,2875 5825,2875 5850,2900 v1(5850,2925)
  Bottom Layer w10: v1(4830,2945) 4850,2925 v1(5850,2925)
M1-PA5_SCLK: PM1.7 U101.16 | length 755
  Top Layer w10: PM1.7@1975,3790 2055.16,3870.16 U101.16@2696.81,3870.16
M1-PA6_MISO: PM1.5 U101.14 | length 781.5
  Top Layer w10: PM1.5@1975,3990 1975,3945 2632.46,3945 2667.93,3909.53 U101.14@2696.81,3909.53
M1-PA7_MOSI: PM1.6 U101.15 | length 721.9
  Top Layer w10: PM1.6@1975,3890 2696.65,3890 U101.15@2696.81,3889.84
M1_EXT_AV: EAV1.2 P7.1 | length 333.5
  Top Layer w10: EAV1.2@4859.53,4470 4995,4470 P7.1@5135,4610
M1_EXT_DV: EDV1.2 P7.2 | length 415.3
  Top Layer w10: EDV1.2@4859.53,4595 5045.39,4595 5100.92,4650.53 5185.53,4650.53 5226.06,4610 P7.2@5235,4610
M2-PA5_SCLK: PM2.7 U201.16 | length 931.2
  Top Layer w10: PM2.7@3930,3790 3930,3830 4005,3905 4678.94,3905 4721.97,3861.97 U201.16@4772.31,3861.97
M2-PA6_MISO: PM2.5 U201.14 | length 881.9
  Top Layer w10: PM2.5@3930,3990 3972.69,3947.31 4703.84,3947.31 4749.73,3901.42 U201.14@4775.17,3901.42
M2-PA7_MOSI: PM2.6 U201.15 | length 880
  Top Layer w10: PM2.6@3930,3890 3945,3890 3986.31,3931.31 4693.69,3931.31 4743.35,3881.65 U201.15@4772.31,3881.65
MAX1_OSCOUT: C1.2 C131.1 U101.20 | length 513.9
  Top Layer w10: C1.2@2372.56,3525 2372.44,3525.12 C131.1@2372.44,3660 2406.44,3694 2578.39,3694 2675.81,3791.42 U101.20@2696.81,3791.42
MAX2_OSCOUT: C6.2 C231.1 U201.20 | length 451
  Top Layer w10: C231.1@4517.56,3525 C6.2@4517.56,3677.5 4642.5,3677.5 4748.23,3783.23 U201.20@4772.31,3783.23
NetAVD_2: AVD.2 C5.2 LMA1.1 | length 365.6
  Top Layer w10: C5.2@1432.68,3680 AVD.2@1523.09,3680 1523.09,3436.71 LMA1.1@1500.55,3414.17
NetC2_1: C2.1 OP1.7 RP12.1 | length 1471.1
  Top Layer w10: C2.1@1529.4,1855 1861.46,1855 1958,1951.54 1958,2069.74 2037.5,2149.24 RP12.1@2037.5,2180 1762,2455.5 1762,2670 1727,2705 OP1.7@1639.49,2705